# Altium PCB Indicator_Board.PcbDoc
Units mil, origin at the board's own origin, x right, y up, seen from the top; angles counter-clockwise.
Board outline 5563.42 x 688.1 mil, 2 copper layers (Top Layer, Bottom Layer); 15 components, 13 nets, 42 pads, 0 vias.
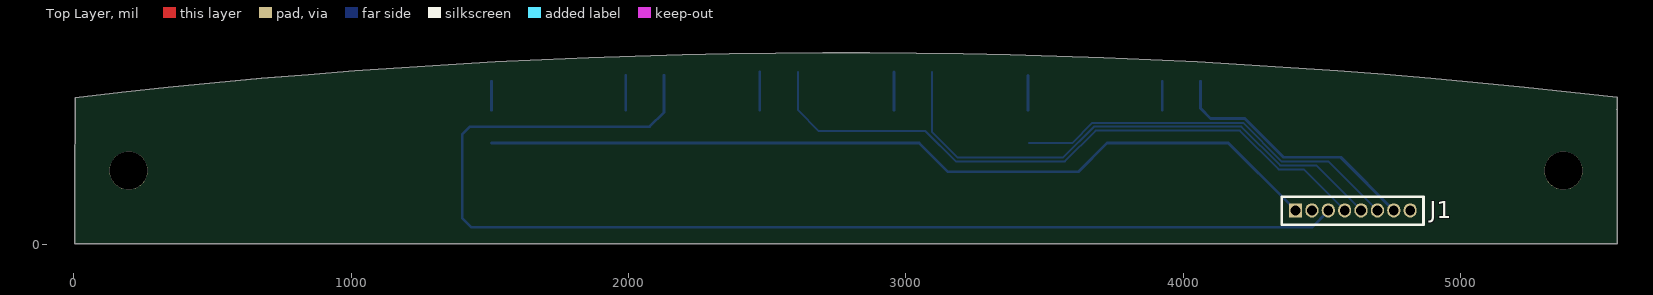
[diagram p0: Top Layer view]
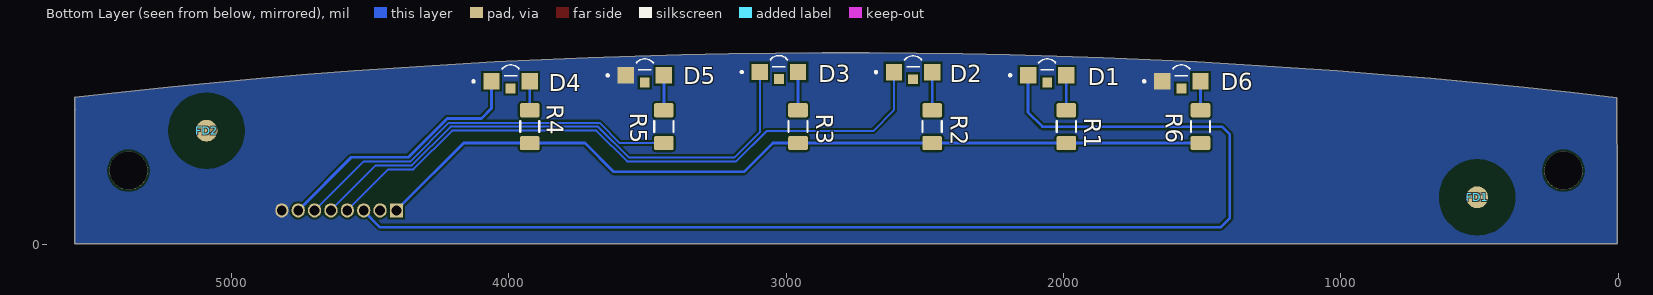
[diagram p1: Bottom Layer view, seen from below]
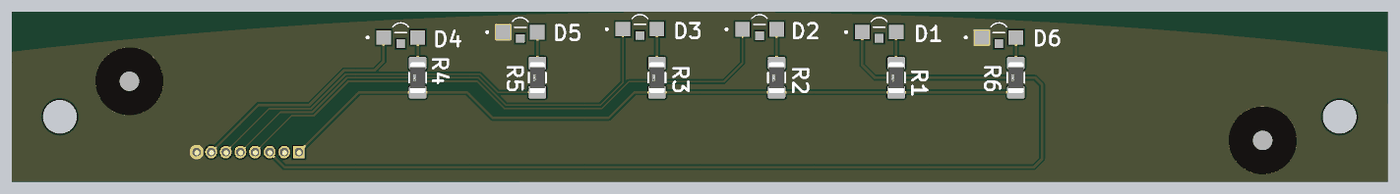
[diagram p2: 3D render of the assembled board from below, using the file's embedded part models]

## Layer stack, top to bottom
Top Solder: solder mask 0.4, Solder Resist, Dk 3.5
Top Layer: signal copper 1.4
Dielectric 1: dielectric 12.6, FR-4, Dk 4.8
Bottom Layer: signal copper 1.4
Bottom Solder: solder mask 0.4, Solder Resist, Dk 3.5

## Board outline
2.52,2.52 3.24,283.87 ccw(c0.73,283.88) 3.24,283.88 3.24,283.87 3.69,438.16 ccw(c1.18,438.17) 3.69,438.17 3.69,438.16 3.98,528.96 cw(c2786.45,-23315.85) 5565.94,529.31 5565.94,487.7 ccw(c5567.13,485.48) 5565.94,483.27 5565.94,2.58

## Design rules (kind name [scope] priority, off if disabled: settings)
Clearance [All] p1: gap=7 ignorepadtopadclearanceinfootprint=FALSE except(0: Arc-Hole Track-Hole SMDPad-Hole THPad-Hole Via-Hole Fill-Hole Poly-Hole Region-Hole Text-Hole)
HoleSize [All] p1: absolutevalues=TRUE maxlimit=157.48 minlimit=1 maxpercent=80.000 minpercent=20.000
PolygonConnect [All] p1: connectstyle=Direct reliefconductorwidth=10 reliefentries=4 polygonreliefangle="90 Angle" airgapwidth=10
RoutingVias [All] p1: holewidth=28 width=50 viastyle="Through Hole" minholewidth=28 minwidth=50 maxholewidth=28 maxwidth=50
SilkToSolderMaskClearance [IsPad] p1: minsilkscreentomaskgap=7.13 clearancetoexposedcopper=TRUE
SolderMaskExpansion [All] p1: expansion=4 istentingtop=FALSE
Width [All] p1: maxlimit=30 minlimit=7 preferedwidth=10 minimp=50.000000 maximp=50.000000 favimp=50.000000
28 further rules are at their usual default settings.

## Classes and differential pairs
component class Indicator_Board: D1 D3 D5 FD1 FD2 J1 R1 R2 R4 R6

## Components (designator, comment, footprint, x,y, rotation, side; value= is the part's Value field where it differs from the comment)
D1 "APA3010QBC/G-GX" LED_APA3010QBC/G-GX 2058.57,609.28 r180 bottom
D2 "APA3010QBC/G-GX" LED_APA3010QBC/G-GX 2542.35,620.66 r180 bottom
D3 "APA3010QBC/G-GX" LED_APA3010QBC/G-GX 3026.12,620.97 r180 bottom
D4 "APA3010QBC/G-GX" LED_APA3010QBC/G-GX 3993.66,587.43 r180 bottom
D5 "APA3010QBC/G-GX" LED_APA3010QBC/G-GX 3509.89,608.84 r180 bottom
D6 "APA3010QBC/G-GX" LED_APA3010QBC/G-GX 1574.8,587.5 r180 bottom
FD1 "Fiducial" FD 507.87,169.29 r0 top
FD2 "Fiducial" FD 5090.55,409.45 r0 top
J1 "HEADER 8x1" CONN_8x1 4613.39,122.44 r0 top
R1 "1k" 1206-R 1989.68,424 r90 bottom
R2 "1k" 1206-R 2473.45,424 r90 bottom
R3 "1k" 1206-R 2957.22,424 r90 bottom
R4 "1k" 1206-R 3924.76,424 r90 bottom
R5 "1k" 1206-R 3440.99,424 r90 bottom
R6 "1k" 1206-R 1505.91,424 r90 bottom

## Footprints (in the part's own frame and the unit in brackets; to place one, negate y for a bottom-side part, rotate by r counter-clockwise, add the part's x,y. Pads: shape width x height; smd on the part's side, far side on the other; paste and mask are expansions set on the pad)
1206-R [mm] "Resistor 1206 Medium Density"
  rrect25% 1.3x1.8 smd: 1(-1.5,0) 2(1.5,0)
  silkscreen extent -0.5,-0.88 0.5,0.87, body extent -1.6,-0.8 1.6,0.8, height 1
CONN_8x1 [mm]
  rect 1.2x1.3 hole 0.9: 1(-5.28,-0.01)
  oval 1.2x1.3 hole 0.9: 2(-3.78,-0.01) 3(-2.28,-0.01) 4(-0.78,-0.01) 5(0.72,-0.01) 6(2.22,-0.01) 7(3.72,-0.01) 8(5.22,-0.01)
  silkscreen extent -6.55,-1.32 6.44,1.24, body extent -6.81,-1.62 6.69,1.23, height 2.7
FD [mm]
  round 2 smd far side mask+2.5: 1(0,0)
  Bottom Layer pour cut-out: 3.492,0 3.226,-1.336 2.469,-2.469 1.336,-3.226 0,-3.492 0,-3.492 -1.336,-3.226 -2.469,-2.469 -3.226,-1.336 -3.492,0 -3.492,0 -3.226,1.336 -2.469,2.469 -1.336,3.226 0,3.492 0,3.492 1.336,3.226 2.469,2.469 3.226,1.336 3.492,0
LED_APA3010QBC/G-GX [mm]
  rect 1.5x1.5 smd: 1(-1.75,0) 2(1.75,0)
  rect 0.9x0.9 smd: 3(0,-0.65)
  silkscreen extent -3.5,-0.1 0.8,1.5, body extent -1.5,-0.5 1.5,1.5, height 1

## Part data
D1 D2 D3 D4 D5 D6: "Surface Mount LED; Size : 3.0X1.0mm ; Color: Blue; Lens: Water Clear", Package=None, Availability=Unavailable, MP=APA3010QBC/G-GX, Price=None
R1 R2 R3 R4 R5 R6: library part Res
J1: system=Connector

## Free pads (board coordinates)
  round 137.8 hole 137.8 unplated: 12(196.85,265.41) 12(5371.61,265.41)

## Nets (pads, with @x,y where several pads share a name; then routed paths per layer and width w, separated by ;. In a path a pad name is that pad's centre, name@x,y a point inside that pad or via, vN(x,y) a via of type N, cw(c..) or ccw(c..) an arc to the next point about the centre after c; other vN are vias at no path point)
GND: D5.1 D6.1 J1.8
NetD1_2: D1.2 R1.2 | length 126.2
  Bottom Layer w10: R1.2 D1.2
NetD2_2: D2.2 R2.2 | length 137.6
  Bottom Layer w10: R2.2 D2.2
NetD3_2: D3.2 R3.2 | length 137.9
  Bottom Layer w10: R3.2 D3.2
NetD4_2: D4.2 R4.2 | length 104.4
  Bottom Layer w10: R4.2 D4.2
NetD5_2: D5.2 R5.2 | length 125.8
  Bottom Layer w10: R5.2 D5.2
NetD6_2: D6.2 R6.2 | length 104.4
  Bottom Layer w10: R6.2 D6.2
P0: D1.1 J1.3 | length 4359.9
  Bottom Layer w10: D1.1 2127.47,475.47 2076,424 1428,424 1400,396 1400,94 1433,61 4464.54,61 4523.62,120.08 J1.3
P1: D2.1 J1.4 | length 2350
  Bottom Layer w7: D2.1 2611.24,483.76 2686.75,408.25 3070.95,408.25 3180.2,299 3573.6,299 3684.45,409.85 4204.55,409.85 4344.4,270 4434.72,270 J1.4
P2: D3.1 J1.5 | length 1972.3
  Bottom Layer w7: D3.1 3095.02,403.98 3186,313 3567.8,313 3678.65,423.85 4210.35,423.85 4350.2,284 4479.78,284 J1.5
P3: J1.6 R5.1 | length 1416.8
  Bottom Layer w7: R5.1@3445,364.95 3599.95,364.95 3672.85,437.85 4216.15,437.85 4356,298 4524.83,298 J1.6
P4: D4.1 J1.7 | length 946.9
  Bottom Layer w10: D4.1 4062.56,490.44 4099.46,453.54 4222.38,453.54 4362.42,313.5 4568.39,313.5 J1.7
VCC: J1.1 R1.1 R2.1 R3.1 R4.1 R6.1 | length 3087.5
  Bottom Layer w10: R6.1 R1.1 R2.1 R3.1 3048.05,364.95 3152,261 3622,261 3725.95,364.95 R4.1 4162.61,364.95 4384.92,142.64 4386.89,142.64 4405.51,124.02 J1.1
pads on no net: D1.3 D2.3 D3.3 D4.3 D5.3 D6.3 FD1.1 FD2.1 J1.2

## Polygon pours and split planes (outlines as drawn)
GND on Bottom Layer "GND" (solid, remove dead copper, pour order 0): 2.52,2.52 3.24,283.87 ccw(c0.73,283.88) 3.24,283.88 3.24,283.87 3.69,438.16 ccw(c1.18,438.17) 3.69,438.17 3.69,438.16 3.98,528.96 cw(c2786.45,-23315.85) 5565.94,529.31 5565.94,487.7 ccw(c5567.13,485.48) 5565.94,483.27 5565.94,2.58

## Silkscreen, mask and mechanical layers (free items; w line width, h text height)
Mechanical 1:
  lines w3.94: 1.47,530.67 cw(c2786.45,-23315.85) 5568.46,531.01
  lines w5: 0.73,530.95 1.47,530.67 1.18,438.17 0.73,283.88 0,0 5568.46,0.07 5568.46,531.01